# Altium PCB temperature.PcbDoc (part 2 of 3)
Units mil, origin at the board's own origin, x right, y up, seen from the top; angles counter-clockwise.
Board outline 6000 x 4000 mil, 2 copper layers (Top Layer, Bottom Layer); 10 components, 17 nets, 62 pads, 0 vias.
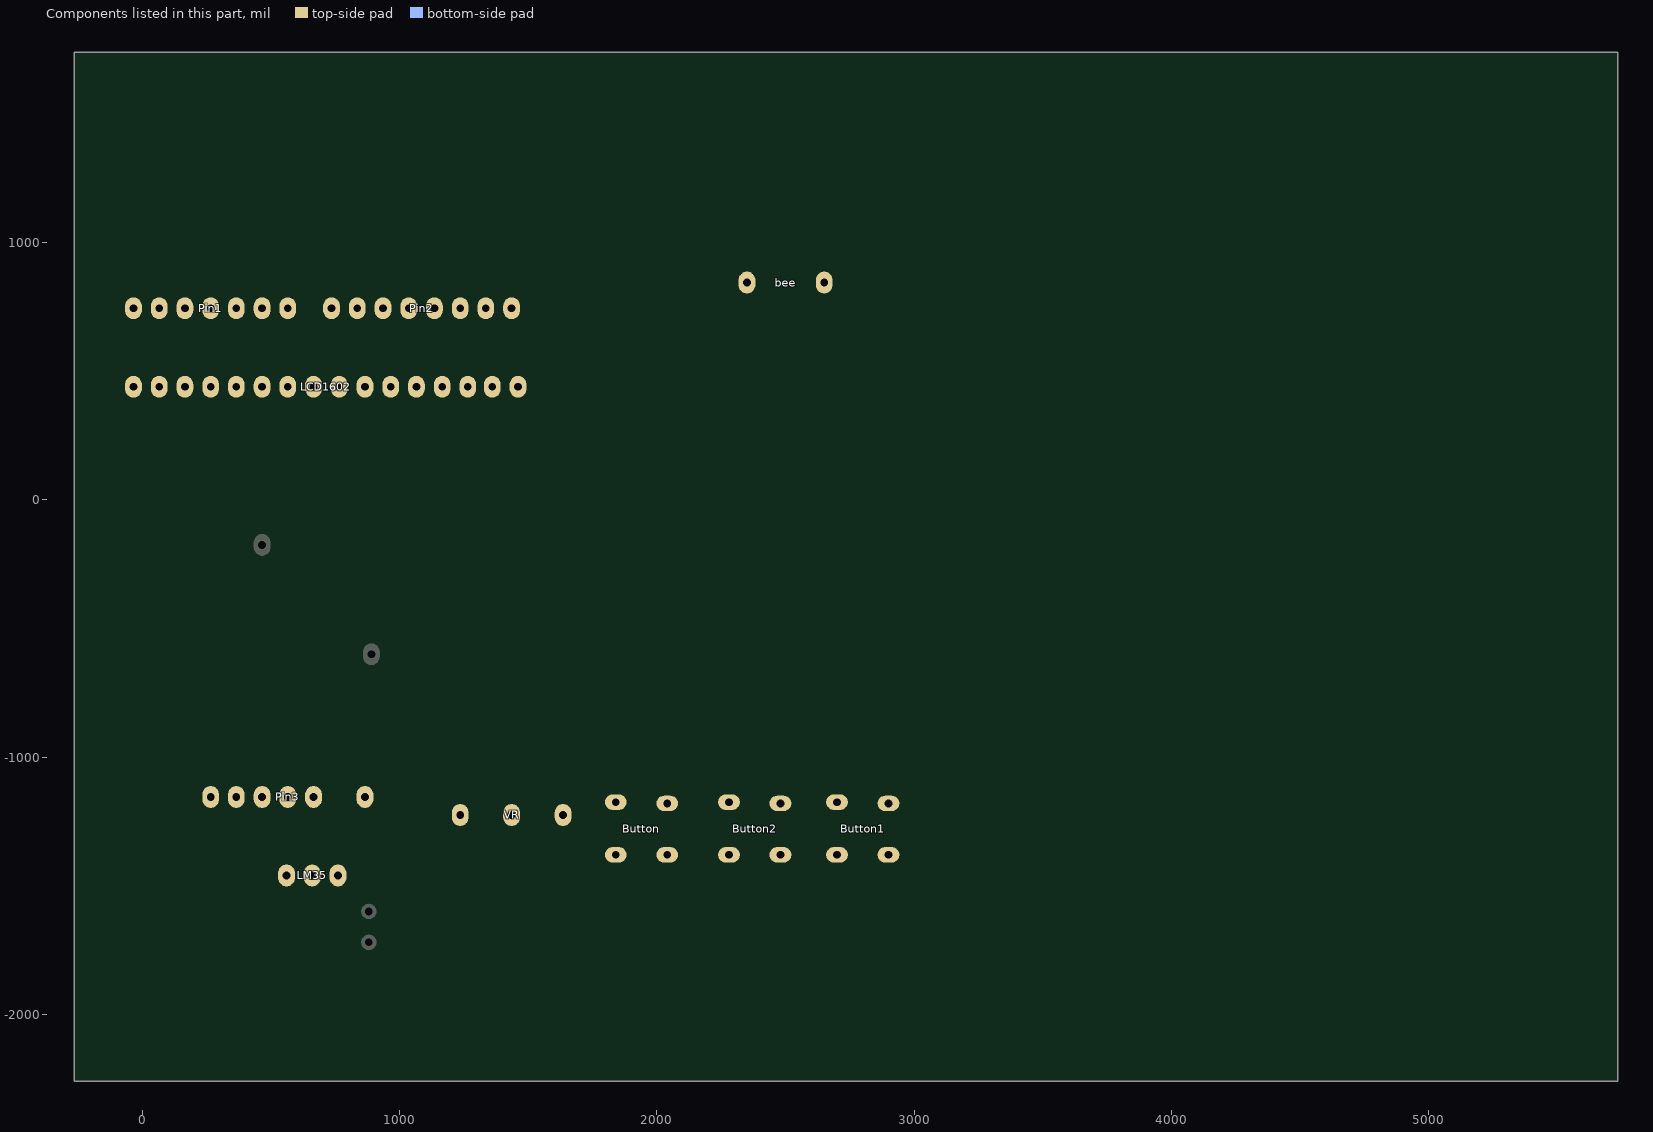
[diagram p2: the components of this part, seen from the top]

## Nets (pads, with @x,y where several pads share a name; then routed paths per layer and width w, separated by ;. In a path a pad name is that pad's centre, name@x,y a point inside that pad or via, vN(x,y) a via of type N, cw(c..) or ccw(c..) an arc to the next point about the centre after c; other vN are vias at no path point) (continued)
copper on no net: (continued)
  Bottom Layer w1: 2096,-334 2121,-334 ; 2097,-339 2128,-339 ; 2097,-338 2131,-338 ; 2097,-337 2121,-337 ; 2097,-336 2123,-336 ; 2097,-335 2122,-335 ; 2097,-333 2121,-333 ; 2097,-332 2119,-332 ; 2097,-331 2120,-331 ; 2097,-330 2118,-330 ; 2097,-329 2118,-329 ; 2097,-328 2117,-328 ; 2098,-342 2134,-342 ; 2098,-341 2133,-341 ; 2098,-340 2131,-340 ; 2098,-327 2116,-327 ; 2098,-326 2117,-326 ; 2098,-325 2115,-325 ; 2098,-324 2115,-324 ; 2099,-344 2139,-344 ; 2099,-343 2136,-343 ; 2099,-323 2116,-323 ; 2099,-322 2115,-322 ; 2100,-346 2160,-346 ; 2100,-345 2146,-345 ; 2100,-321 2116,-321 ; 2100,-320 2116,-320 ; 2100,-319 2116,-319 ; 2100,-318 2116,-318 ; 2101,-347 2168,-347 ; 2101,-317 2116,-317 ; 2101,-316 2116,-316 ; 2101,-315 2118,-315 ; 2102,-348 2178,-348 ; 2102,-314 2117,-314 ; 2102,-313 2118,-313 ; 2102,-312 2118,-312 ; 2103,-350 2195,-350 ; 2103,-349 2182,-349 ; 2104,-311 2119,-311 ; 2104,-310 2121,-310 ; 2105,-351 2195,-351 ; 2105,-309 2120,-309 ; 2105,-308 2122,-308 ; 2105,-307 2122,-307 ; 2105,-306 2122,-306 ; 2106,-305 2124,-305 ; 2106,-304 2124,-304 ; 2107,-352 2203,-352 ; 2107,-303 2123,-303 ; 2107,-302 2125,-302 ; 2107,-301 2124,-301 ; 2108,-300 2124,-300 ; 2108,-299 2126,-299 ; 2108,-298 2125,-298 ; 2109,-353 2211,-353 ; 2109,-297 2126,-297 ; 2109,-296 2125,-296 ; 2109,-295 2127,-295 ; 2109,-294 2126,-294 ; 2109,-220 2118,-220 ; 2109,-219 2119,-219 ; 2109,-218 2118,-218 ; 2109,-217 2119,-217 ; 2109,-216 2118,-216 ; 2109,-215 2119,-215 ; 2109,-214 2117,-214 ; 2109,-213 2117,-213 ; 2109,-212 2119,-212 ; 2109,-211 2119,-211 ; 2109,-210 2117,-210 ; 2109,-209 2119,-209 ; 2109,-208 2119,-208 ; 2109,-207 2119,-207 ; 2109,-206 2119,-206 ; 2109,-205 2120,-205 ; 2109,-204 2120,-204 ; 2109,-203 2119,-203 ; 2109,-202 2121,-202 ; 2109,-201 2120,-201 ; 2109,-200 2124,-200 ; 2109,-199 2123,-199 ; 2110,-293 2127,-293 ; 2110,-292 2127,-292 ; 2110,-291 2126,-291 ; 2110,-241 2123,-241 ; 2110,-240 2120,-240 ; 2110,-225 2119,-225 ; 2110,-224 2119,-224 ; 2110,-223 2119,-223 ; 2110,-222 2119,-222 ; 2110,-221 2119,-221 ; 2110,-198 2122,-198 ; 2110,-197 2124,-197 ; 2111,-290 2126,-290 ; 2111,-289 2126,-289 ; 2111,-288 2128,-288 ; 2111,-243 2122,-243 ; 2111,-242 2120,-242 ; 2111,-239 2121,-239 ; 2111,-238 2121,-238 ; 2111,-237 2119,-237 ; 2111,-236 2121,-236 ; 2111,-235 2122,-235 ; 2111,-234 2122,-234 ; 2111,-233 2120,-233 ; 2111,-232 2120,-232 ; 2111,-231 2121,-231 ; 2111,-230 2118,-230 ; 2111,-229 2119,-229 ; 2111,-228 2120,-228 ; 2111,-227 2120,-227 ; 2111,-226 2118,-226 ; 2111,-196 2122,-196 ; 2111,-195 2122,-195 ; 2112,-287 2127,-287 ; 2112,-286 2127,-286 ; 2112,-285 2126,-285 ; 2112,-284 2128,-284 ; 2112,-283 2127,-283 ; 2112,-282 2127,-282 ; 2112,-281 2127,-281 ; 2112,-275 2128,-275 ; 2112,-245 2123,-245 ; 2112,-244 2121,-244 ; 2112,-194 2124,-194 ; 2113,-354 2212,-354 ; 2113,-280 2127,-280 ; 2113,-279 2128,-279 ; 2113,-278 2127,-278 ; 2113,-277 2127,-277 ; 2113,-276 2127,-276 ; 2113,-274 2128,-274 ; 2113,-273 2127,-273 ; 2113,-272 2127,-272 ; 2113,-271 2127,-271 ; 2113,-270 2127,-270 ; 2113,-257 2125,-257 ; 2113,-256 2125,-256 ; 2113,-255 2125,-255 ; 2113,-254 2125,-254 ; 2113,-253 2124,-253 ; 2113,-252 2124,-252 ; 2113,-251 2125,-251 ; 2113,-250 2122,-250 ; 2113,-249 2124,-249 ; 2113,-248 2122,-248 ; 2113,-247 2121,-247 ; 2113,-246 2123,-246 ; 2113,-193 2126,-193 ; 2114,-269 2128,-269 ; 2114,-268 2127,-268 ; 2114,-267 2127,-267 ; 2114,-266 2127,-266 ; 2114,-265 2126,-265 ; 2114,-264 2126,-264 ; 2114,-263 2127,-263 ; 2114,-262 2126,-262 ; 2114,-261 2125,-261 ; 2114,-260 2124,-260 ; 2114,-259 2125,-259 ; 2114,-258 2124,-258 ; 2114,-192 2130,-192 ; 2114,-191 2129,-191 ; 2115,-355 2216,-355 ; 2115,-190 2130,-190 ; 2116,-189 2131,-189 ; 2117,-188 2135,-188 ; 2118,-356 2218,-356 ; 2118,-314 2119,-314 ; 2118,-214 2119,-214 ; 2118,-213 2119,-213 ; 2118,-210 2119,-210 ; 2118,-187 2137,-187 ; 2119,-312 2120,-312 ; 2119,-230 2121,-230 ; 2119,-226 2120,-226 ; 2119,-186 2137,-186 ; 2120,-332 2121,-332 ; 2120,-203 2121,-203 ; 2120,-185 2148,-185 ; 2121,-309 2122,-309 ; 2121,-242 2122,-242 ; 2121,-240 2122,-240 ; 2121,-237 2122,-237 ; 2121,-232 2122,-232 ; 2122,-337 2128,-337 ; 2122,-333 2123,-333 ; 2122,-247 2123,-247 ; 2122,-184 2190,-184 ; 2123,-250 2125,-250 ; 2123,-248 2125,-248 ; 2123,-236 2124,-236 ; 2123,-198 2125,-198 ; 2123,-196 2125,-196 ; 2123,-195 2124,-195 ; 2123,-183 2192,-183 ; 2124,-357 2224,-357 ; 2124,-336 2128,-336 ; 2125,-335 2126,-335 ; 2125,-301 2126,-301 ; 2125,-300 2126,-300 ; 2125,-260 2126,-260 ; 2125,-258 2126,-258 ; 2125,-199 2126,-199 ; 2125,-194 2126,-194 ; 2126,-358 2230,-358 ; 2126,-197 2127,-197 ; 2126,-195 2127,-195 ; 2126,-182 2192,-182 ; 2127,-291 2128,-291 ; 2127,-290 2128,-290 ; 2127,-289 2128,-289 ; 2127,-193 2128,-193 ; 2128,-181 2191,-181 ; 2129,-289 2130,-289 ; 2130,-359 2237,-359 ; 2130,-191 2131,-191 ; 2131,-339 2132,-339 ; 2132,-340 2136,-340 ; 2132,-191 2133,-191 ; 2132,-190 2133,-190 ; 2132,-189 2133,-189 ; 2132,-180 2194,-180 ; 2134,-360 2241,-360 ; 2134,-341 2137,-341 ; 2134,-189 2135,-189 ; 2138,-361 2249,-361 ; 2138,-179 2157,-179 ; 2139,-343 2141,-343 ; 2139,-186 2140,-186 ; 2141,-362 2250,-362 ; 2141,-344 2142,-344 ; 2144,-343 2145,-343 ; 2146,-363 2250,-363 ; 2147,-344 2148,-344 ; 2148,-188 2149,-188 ; 2148,-186 2149,-186 ; 2149,-364 2258,-364 ; 2149,-345 2151,-345 ; 2149,-343 2150,-343 ; 2151,-185 2154,-185 ; 2152,-345 2153,-345 ; 2152,-344 2153,-344 ; 2153,-365 2260,-365 ; 2153,-186 2180,-186 ; 2155,-185 2188,-185 ; 2156,-345 2158,-345 ; 2156,-187 2176,-187 ; 2157,-366 2266,-366 ; 2158,-188 2159,-188 ; 2160,-367 2264,-367 ; 2160,-345 2162,-345 ; 2160,-188 2163,-188 ; 2161,-189 2164,-189 ; 2163,-368 2274,-368 ; 2163,-346 2174,-346 ; 2163,-345 2164,-345 ; 2163,-190 2164,-190 ; 2164,-188 2177,-188 ; 2164,-179 2196,-179 ; 2165,-190 2174,-190 ; 2166,-369 2274,-369 ; 2166,-189 2177,-189 ; 2169,-347 2171,-347 ; 2170,-370 2279,-370 ; 2172,-347 2176,-347 ; 2173,-371 2283,-371 ; 2173,-178 2196,-178 ; 2177,-372 2294,-372 ; 2177,-187 2178,-187 ; 2177,-177 2193,-177 ; 2178,-188 2179,-188 ; 2179,-348 2182,-348 ; 2179,-187 2181,-187 ; 2179,-176 2197,-176 ; 2181,-373 2293,-373 ; 2182,-187 2183,-187 ; 2182,-175 2192,-175 ; 2183,-348 2185,-348 ; 2184,-186 2185,-186 ; 2184,-174 2199,-174 ; 2185,-374 2299,-374 ; 2185,-173 2199,-173 ; 2186,-172 2198,-172 ; 2187,-171 2195,-171 ; 2188,-375 2302,-375 ; 2188,-170 2199,-170 ; 2189,-169 2200,-169 ; 2190,-168 2199,-168 ; 2190,-167 2202,-167 ; 2191,-166 2203,-166 ; 2191,-165 2202,-165 ; 2192,-376 2313,-376 ; 2192,-181 2195,-181 ; 2192,-164 2204,-164 ; 2192,-163 2203,-163 ; 2193,-175 2199,-175 ; 2193,-162 2205,-162 ; 2193,-161 2204,-161 ; 2194,-177 2197,-177 ; 2194,-160 2204,-160 ; 2195,-377 2308,-377 ; 2195,-159 2205,-159 ; 2195,-158 2206,-158 ; 2196,-350 2198,-350 ; 2196,-171 2200,-171 ; 2196,-157 2206,-157 ; 2197,-351 2203,-351 ; 2197,-156 2205,-156 ; 2197,-155 2206,-155 ; 2197,-154 2206,-154 ; 2198,-153 2207,-153 ; 2199,-152 2206,-152 ; 2199,-151 2207,-151 ; 2199,-124 2274,-124 ; 2199,-123 2274,-123 ; 2199,-122 2274,-122 ; 2199,-121 2274,-121 ; 2199,-120 2274,-120 ; 2199,-119 2274,-119 ; 2199,-118 2274,-118 ; 2199,-117 2274,-117 ; 2199,-116 2274,-116 ; 2199,-115 2256,-115 ; 2199,-114 2256,-114 ; 2199,-113 2256,-113 ; 2199,-112 2256,-112 ; 2199,-111 2256,-111 ; 2199,-110 2256,-110 ; 2199,-109 2255,-109 ; 2199,-108 2253,-108 ; 2199,-107 2253,-107 ; 2199,-106 2253,-106 ; 2199,-105 2253,-105 ; 2199,-104 2253,-104 ; 2199,-103 2252,-103 ; 2199,-102 2252,-102 ; 2200,-378 2395,-378 ; 2200,-172 2201,-172 ; 2200,-168 2202,-168 ; 2200,-150 2207,-150 ; 2200,-149 2208,-149 ; 2200,-131 2234,-131 ; 2200,-130 2276,-130 ; 2200,-129 2275,-129 ; 2200,-128 2275,-128 ; 2200,-127 2275,-127 ; 2200,-126 2275,-126 ; 2200,-125 2274,-125 ; 2200,-101 2252,-101 ; 2200,-100 2252,-100 ; 2200,-99 2252,-99 ; 2200,-98 2252,-98 ; 2200,-97 2252,-97 ; 2200,-96 2252,-96 ; 2200,-95 2252,-95 ; 2200,-94 2252,-94 ; 2200,-93 2253,-93 ; 2201,-169 2202,-169 ; 2201,-148 2209,-148 ; 2201,-132 2228,-132 ; 2201,-92 2275,-92 ; 2202,-147 2209,-147 ; 2202,-146 2210,-146 ; 2202,-134 2223,-134 ; 2202,-133 2224,-133 ; 2202,-91 2253,-91 ; 2202,-90 2275,-90 ; 2202,-89 2275,-89 ; 2202,-88 2275,-88 ; 2203,-165 2204,-165 ; 2203,-145 2210,-145 ; 2203,-135 2221,-135 ; 2203,-87 2251,-87 ; 2203,-86 2251,-86 ; 2204,-379 2394,-379 ; 2204,-352 2205,-352 ; 2204,-144 2211,-144 ; 2204,-143 2212,-143 ; 2204,-137 2219,-137 ; 2204,-136 2220,-136 ; 2204,-85 2251,-85 ; 2204,-84 2251,-84 ; 2204,-83 2251,-83 ; 2205,-138 2217,-138 ; 2205,-82 2251,-82 ; 2205,-81 2251,-81 ; 2205,-80 2251,-80 ; 2206,-352 2208,-352 ; 2206,-142 2212,-142 ; 2206,-141 2213,-141 ; 2206,-140 2214,-140 ; 2206,-139 2216,-139 ; 2206,-79 2251,-79 ; 2207,-152 2208,-152 ; 2207,-78 2251,-78 ; 2207,-77 2251,-77 ; 2208,-380 2393,-380 ; 2208,-150 2209,-150 ; 2208,-76 2251,-76 ; 2209,-352 2210,-352 ; 2209,-75 2251,-75 ; 2209,-74 2251,-74 ; 2210,-73 2251,-73 ; 2210,-72 2251,-72 ; 2211,-71 2251,-71 ; 2212,-381 2393,-381 ; 2212,-353 2213,-353 ; 2212,-70 2251,-70 ; 2212,-69 2277,-69 ; 2213,-68 2278,-68 ; 2213,-67 2278,-67 ; 2214,-66 2278,-66 ; 2215,-382 2392,-382 ; 2215,-65 2279,-65 ; 2215,-64 2279,-64 ; 2216,-63 2279,-63 ; 2217,-355 2218,-355 ; 2217,-62 2279,-62 ; 2217,-61 2279,-61 ; 2218,-60 2280,-60 ; 2218,-59 2280,-59 ; 2219,-356 2224,-356 ; 2219,-58 2280,-58 ; 2220,-383 2392,-383 ; 2220,-57 2280,-57 ; 2220,-56 2280,-56 ; 2221,-55 2281,-55 ; 2221,-54 2281,-54 ; 2222,-53 2281,-53 ; 2223,-384 2390,-384 ; 2223,-52 2282,-52 ; 2223,-51 2282,-51 ; 2224,-50 2282,-50 ; 2224,-49 2282,-49 ; 2225,-357 2228,-357 ; 2225,-356 2226,-356 ; 2225,-48 2283,-48 ; 2225,-47 2283,-47 ; 2225,-46 2283,-46 ; 2226,-45 2284,-45 ; 2227,-385 2388,-385 ; 2227,-44 2284,-44 ; 2227,-43 2284,-43 ; 2228,-42 2285,-42 ; 2228,-41 2285,-41 ; 2229,-357 2230,-357 ; 2229,-40 2285,-40 ; 2229,-39 2285,-39 ; 2230,-38 2286,-38 ; 2230,-37 2286,-37 ; 2231,-386 2382,-386 ; 2231,-36 2287,-36 ; 2232,-358 2233,-358 ; 2232,-35 2287,-35 ; 2232,-34 2287,-34 ; 2232,-33 2288,-33 ; 2233,-32 2289,-32 ; 2233,-31 2289,-31 ; 2234,-358 2235,-358 ; 2234,-30 2289,-30 ; 2234,-29 2290,-29 ; 2235,-357 2236,-357 ; 2235,-131 2276,-131 ; 2235,-28 2290,-28 ; 2235,-27 2290,-27 ; 2235,-26 2291,-26 ; 2236,-387 2377,-387 ; 2236,-358 2238,-358 ; 2236,-25 2291,-25 ; 2236,-24 2292,-24 ; 2237,-23 2292,-23 ; 2237,-22 2292,-22 ; 2238,-359 2240,-359 ; 2238,-21 2293,-21 ; 2238,-20 2293,-20 ; 2239,-358 2240,-358 ; 2239,-19 2294,-19 ; 2239,-18 2294,-18 ; 2240,-132 2271,-132 ; 2240,-17 2294,-17 ; 2240,-16 2295,-16 ; 2240,-15 2295,-15 ; 2241,-388 2376,-388 ; 2241,-359 2242,-359 ; 2241,-14 2296,-14 ; 2241,-13 2296,-13 ; 2242,-12 2297,-12 ; 2242,-11 2297,-11 ; 2242,-10 2297,-10 ; 2242,-9 2298,-9 ; 2243,-389 2375,-389 ; 2243,-133 2272,-133 ; 2243,-8 2298,-8 ; 2243,-7 2299,-7 ; 2244,-359 2245,-359 ; 2244,-6 2299,-6 ; 2244,-5 2300,-5 ; 2244,-4 2300,-4 ; 2245,-3 2301,-3 ; 2245,-2 2301,-2 ; 2245,-1 2302,-1 ; 2246,-135 2274,-135 ; 2246,-134 2272,-134 ; 2246,0 2302,0 ; 2246,1 2302,1 ; 2247,-390 2374,-390 ; 2247,-136 2274,-136 ; 2247,2 2303,2 ; 2247,3 2304,3 ; 2247,4 2304,4 ; 2248,5 2305,5 ; 2248,6 2305,6 ; 2248,7 2306,7 ; 2249,-137 2276,-137 ; 2249,8 2306,8 ; 2249,9 2306,9 ; 2249,10 2307,10 ; 2250,-361 2251,-361 ; 2250,11 2307,11 ; 2250,12 2308,12 ; 2250,13 2308,13 ; 2251,-391 2374,-391 ; 2251,-363 2254,-363 ; 2251,-139 2277,-139 ; 2251,-138 2277,-138 ; 2251,14 2309,14 ; 2251,15 2310,15 ; 2251,16 2310,16 ; 2251,17 2310,17 ; 2252,-361 2253,-361 ; 2252,-87 2275,-87 ; 2252,-86 2275,-86 ; 2252,-85 2276,-85 ; 2252,-84 2276,-84 ; 2252,-83 2276,-83 ; 2252,-82 2276,-82 ; 2252,-81 2276,-81 ; 2252,-80 2276,-80 ; 2252,-79 2276,-79 ; 2252,-78 2277,-78 ; 2252,-77 2277,-77 ; 2252,-76 2277,-76 ; 2252,-75 2277,-75 ; 2252,-74 2277,-74 ; 2252,-73 2277,-73 ; 2252,-72 2277,-72 ; 2252,-71 2277,-71 ; 2252,-70 2277,-70 ; 2252,18 2311,18 ; 2252,19 2312,19 ; 2253,-392 2372,-392 ; 2253,-140 2279,-140 ; 2253,20 2312,20 ; 2253,21 2313,21 ; 2253,22 2314,22 ; 2254,-141 2280,-141 ; 2254,-96 2275,-96 ; 2254,-95 2275,-95 ; 2254,-94 2275,-94 ; 2254,-93 2275,-93 ; 2254,-91 2275,-91 ; 2254,23 2314,23 ; 2254,24 2314,24 ; 2254,25 2315,25 ; 2255,-363 2256,-363 ; 2255,-142 2281,-142 ; 2255,-102 2274,-102 ; 2255,-101 2274,-101 ; 2255,-100 2274,-100 ; 2255,-99 2274,-99 ; 2255,-98 2274,-98 ; 2255,-97 2274,-97 ; 2255,26 2316,26 ; 2255,27 2316,27 ; 2255,28 2317,28 ; 2256,-393 2372,-393 ; 2256,-143 2282,-143 ; 2256,-109 2274,-109 ; 2256,-108 2274,-108 ; 2256,-107 2274,-107 ; 2256,-106 2274,-106 ; 2256,-105 2274,-105 ; 2256,-104 2274,-104 ; 2256,-103 2274,-103 ; 2256,29 2317,29 ; 2256,30 2318,30 ; 2256,31 2318,31 ; 2256,32 2319,32 ; 2257,-363 2258,-363 ; 2257,-145 2284,-145 ; 2257,-144 2282,-144 ; 2257,-115 2274,-115 ; 2257,-114 2274,-114 ; 2257,-113 2274,-113 ; 2257,-112 2274,-112 ; 2257,-111 2274,-111 ; 2257,-110 2274,-110 ; 2257,33 2319,33 ; 2257,34 2320,34 ; 2257,35 2320,35 ; 2257,36 2320,36 ; 2258,-146 2285,-146 ; 2258,37 2321,37 ; 2258,38 2322,38 ; 2258,39 2322,39 ; 2258,40 2323,40 ; 2259,-394 2370,-394 ; 2259,-364 2260,-364 ; 2259,41 2323,41 ; 2259,42 2324,42 ; 2259,43 2325,43 ; 2259,44 2325,44 ; 2260,-148 2288,-148 ; 2260,-147 2287,-147 ; 2260,45 2326,45 ; 2260,46 2326,46 ; 2260,47 2327,47 ; 2260,48 2327,48 ; 2261,-365 2262,-365 ; 2261,-149 2289,-149 ; 2261,49 2328,49 ; 2261,50 2328,50 ; 2261,51 2329,51 ; 2261,52 2330,52 ; 2262,-395 2369,-395 ; 2262,-150 2290,-150 ; 2262,53 2330,53 ; 2262,54 2331,54 ; 2263,55 2331,55 ; 2263,56 2332,56 ; 2264,-396 2369,-396 ; 2264,-152 2292,-152 ; 2264,-151 2291,-151 ; 2264,57 2332,57 ; 2264,58 2332,58 ; 2264,59 2332,59 ; 2265,-367 2270,-367 ; 2265,-153 2293,-153 ; 2265,60 2332,60 ; 2266,-397 2367,-397 ; 2266,-365 2267,-365 ; 2266,-154 2294,-154 ; 2266,61 2333,61 ; 2266,62 2333,62 ; 2267,-366 2268,-366 ; 2267,-155 2295,-155 ; 2267,63 2333,63 ; 2267,64 2333,64 ; 2268,-398 2366,-398 ; 2268,-157 2298,-157 ; 2268,-156 2297,-156 ; 2268,65 2333,65 ; 2269,-160 2301,-160 ; 2269,66 2333,66 ; 2269,67 2333,67 ; 2269,68 2333,68 ; 2270,-159 2300,-159 ; 2270,-158 2298,-158 ; 2270,69 2333,69 ; 2270,70 2333,70 ; 2271,-399 2365,-399 ; 2271,-162 2303,-162 ; 2271,-161 2302,-161 ; 2271,71 2334,71 ; 2272,-163 2305,-163 ; 2272,72 2334,72 ; 2272,73 2334,73 ; 2272,74 2334,74 ; 2273,-400 2364,-400 ; 2273,-132 2276,-132 ; 2273,75 2334,75 ; 2274,-165 2306,-165 ; 2274,-164 2305,-164 ; 2274,76 2334,76 ; 2274,77 2335,77 ; 2275,-369 2282,-369 ; 2275,-368 2276,-368 ; 2275,-167 2309,-167 ; 2275,-166 2308,-166 ; 2275,78 2335,78 ; 2276,-401 2363,-401 ; 2276,-169 2312,-169 ; 2276,-168 2310,-168 ; 2276,79 2335,79 ; 2276,80 2335,80 ; 2277,-170 2313,-170 ; 2277,81 2335,81 ; 2278,-171 2314,-171 ; 2278,82 2336,82 ; 2279,-402 2362,-402 ; 2279,-173 2317,-173 ; 2279,-172 2315,-172 ; 2279,83 2336,83 ; 2279,84 2336,84 ; 2280,85 2336,85 ; 2281,-370 2286,-370 ; 2281,-175 2320,-175 ; 2281,-174 2319,-174 ; 2281,86 2336,86 ; 2282,-403 2361,-403 ; 2282,-177 2322,-177 ; 2282,-176 2321,-176 ; 2282,87 2337,87 ; 2282,88 2337,88 ; 2283,-179 2325,-179 ; 2283,-178 2323,-178 ; 2284,-404 2359,-404 ; 2284,-371 2290,-371 ; 2284,-180 2325,-180 ; 2284,89 2337,89 ; 2284,90 2337,90 ; 2285,-181 2327,-181 ; 2285,91 2338,91 ; 2286,-405 2358,-405 ; 2286,-183 2329,-183 ; 2286,-182 2328,-182 ; 2286,92 2338,92 ; 2287,-185 2332,-185 ; 2287,-184 2331,-184 ; 2287,93 2338,93 ; 2288,-186 2334,-186 ; 2288,94 2338,94 ; 2288,95 2339,95 ; 2289,-406 2357,-406 ; 2289,-187 2335,-187 ; 2289,96 2339,96 ; 2290,-189 2338,-189 ; 2290,-188 2336,-188 ; 2290,97 2339,97 ; 2291,-407 2355,-407 ; 2291,-191 2339,-191 ; 2291,-190 2338,-190 ; 2291,98 2340,98 ; 2292,-193 2342,-193 ; 2292,-192 2341,-192 ; 2292,99 2340,99 ; 2293,-194 2343,-194 ; 2293,100 2340,100 ; 2294,-408 2353,-408 ; 2294,-373 2295,-373 ; 2294,-196 2346,-196 ; 2294,-195 2344,-195 ; 2294,101 2341,101 ; 2295,-372 2297,-372 ; 2295,102 2341,102 ; 2295,103 2342,103 ; 2296,-373 2298,-373 ; 2296,-198 2348,-198 ; 2296,-197 2347,-197 ; 2296,104 2342,104 ; 2297,-409 2351,-409 ; 2297,-201 2352,-201 ; 2297,-200 2351,-200 ; 2297,-199 2349,-199 ; 2297,105 2343,105 ; 2298,-202 2354,-202 ; 2298,106 2343,106 ; 2299,-373 2300,-373 ; 2299,-203 2355,-203 ; 2299,107 2343,107 ; 2299,108 2344,108 ; 2300,-410 2347,-410 ; 2300,-374 2303,-374 ; 2300,-205 2358,-205 ; 2300,-204 2356,-204 ; 2300,109 2344,109 ; 2301,-207 2360,-207 ; 2301,-206 2359,-206 ; 2301,110 2345,110 ; 2302,-208 2361,-208 ; 2302,111 2346,111 ; 2302,112 2346,112 ; 2303,-411 2345,-411 ; 2303,-211 2365,-211 ; 2303,-210 2364,-210 ; 2303,-209 2363,-209 ; 2303,113 2346,113 ; 2304,114 2347,114 ; 2305,-214 2369,-214 ; 2305,-213 2368,-213 ; 2305,-212 2367,-212 ; 2305,115 2348,115 ; 2306,-412 2342,-412 ; 2306,-215 2370,-215 ; 2306,116 2348,116 ; 2307,-217 2372,-217 ; 2307,-216 2371,-216 ; 2307,117 2349,117 ; 2308,-219 2374,-219 ; 2308,-218 2373,-218 ; 2308,118 2349,118 ; 2308,119 2350,119 ; 2309,-377 2395,-377 ; 2309,-220 2375,-220 ; 2309,120 2350,120 ; 2310,-222 2377,-222 ; 2310,-221 2376,-221 ; 2310,121 2351,121 ; 2310,122 2351,122 ; 2311,-413 2338,-413 ; 2311,-224 2379,-224 ; 2311,-223 2378,-223 ; 2311,123 2352,123 ; 2312,-225 2379,-225 ; 2312,124 2353,124 ; 2313,-375 2400,-375 ; 2313,-227 2381,-227 ; 2313,-226 2380,-226 ; 2313,125 2353,125 ; 2314,-376 2397,-376 ; 2314,-228 2382,-228 ; 2314,126 2354,126 ; 2315,-232 2384,-232 ; 2315,-230 2383,-230 ; 2315,-229 2382,-229 ; 2315,127 2355,127 ; 2315,128 2355,128 ; 2316,-233 2384,-233 ; 2316,-231 2383,-231 ; 2316,129 2356,129 ; 2317,-374 2402,-374 ; 2317,-235 2386,-235 ; 2317,-234 2384,-234 ; 2317,130 2356,130 ; 2318,-414 2335,-414 ; 2318,-236 2386,-236 ; 2318,131 2357,131 ; 2318,132 2357,132 ; 2319,-237 2386,-237 ; 2320,-239 2387,-239 ; 2320,-238 2386,-238 ; 2320,133 2358,133 ; 2320,134 2359,134 ; 2321,-241 2387,-241 ; 2321,-240 2387,-240 ; 2321,135 2359,135 ; 2322,-373 2323,-373 ; 2322,-242 2387,-242 ; 2322,136 2360,136 ; 2322,137 2360,137 ; 2323,-244 2387,-244 ; 2323,-243 2387,-243 ; 2323,138 2361,138 ; 2324,-373 2418,-373 ; 2324,-372 2325,-372 ; 2324,-245 2387,-245 ; 2324,139 2362,139 ; 2325,-371 2326,-371 ; 2325,-247 2387,-247 ; 2325,-246 2387,-246 ; 2325,140 2362,140 ; 2325,141 2363,141 ; 2326,-372 2425,-372 ; 2326,-248 2387,-248 ; 2326,142 2363,142 ; 2327,-370 2441,-370 ; 2327,-250 2387,-250 ; 2327,-249 2387,-249 ; 2327,143 2364,143 ; 2328,-371 2431,-371 ; 2328,-253 2387,-253 ; 2328,-252 2387,-252 ; 2328,-251 2387,-251 ; 2328,144 2364,144 ; 2328,145 2365,145 ; 2329,-369 2330,-369 ; 2329,-254 2387,-254 ; 2329,146 2365,146 ; 2330,-255 2387,-255 ; 2330,147 2366,147 ; 2331,-369 2651,-369 ; 2331,-368 2332,-368 ; 2331,-256 2386,-256 ; 2331,148 2367,148 ; 2331,149 2367,149 ; 2332,-367 2333,-367 ; 2332,-258 2385,-258 ; 2332,-257 2386,-257 ; 2333,-368 2648,-368 ; 2333,-260 2384,-260 ; 2333,-259 2384,-259 ; 2333,150 2368,150 ; 2333,151 2369,151 ; 2334,-367 2644,-367 ; 2334,-261 2383,-261 ; 2334,152 2369,152 ; 2335,-366 2646,-366 ; 2335,-365 2642,-365 ; 2335,-263 2381,-263 ; 2335,-262 2382,-262 ; 2335,153 2370,153 ; 2336,-364 2644,-364 ; 2336,-265 2379,-265 ; 2336,-264 2380,-264 ; 2336,154 2370,154 ; 2336,155 2371,155 ; 2337,-266 2377,-266 ; 2337,156 2372,156 ; 2338,-363 2644,-363 ; 2338,-361 2339,-361 ; 2338,-268 2373,-268 ; 2338,-267 2375,-267 ; 2338,157 2372,157 ; 2338,158 2373,158 ; 2339,-270 2369,-270 ; 2339,-269 2371,-269 ; 2339,159 2373,159 ; 2339,160 2374,160 ; 2340,-362 2641,-362 ; 2340,-361 2642,-361 ; 2340,-360 2641,-360 ; 2340,-359 2342,-359 ; 2340,-271 2366,-271 ; 2340,161 2375,161 ; 2341,-273 2342,-273 ; 2341,162 2375,162 ; 2342,-272 2363,-272 ; 2342,163 2376,163 ; 2343,-359 2636,-359 ; 2343,-358 2638,-358 ; 2343,-357 2639,-357 ; 2343,-356 2638,-356 ; 2343,-275 2353,-275 ; 2343,-274 2353,-274 ; 2343,-273 2360,-273 ; 2343,164 2377,164 ; 2343,165 2378,165 ; 2344,-355 2637,-355 ; 2344,-276 2353,-276 ; 2344,166 2378,166 ; 2344,167 2379,167 ; 2345,-354 2637,-354 ; 2345,-353 2346,-353 ; 2345,-352 2636,-352 ; 2345,-277 2354,-277 ; 2345,168 2379,168 ; 2345,169 2379,169 ; 2346,-351 2631,-351 ; 2346,-280 2356,-280 ; 2346,-279 2355,-279 ; 2346,-278 2354,-278 ; 2346,170 2379,170 ; 2346,171 2379,171 ; 2346,172 2379,172 ; 2347,-353 2636,-353 ; 2347,-281 2356,-281 ; 2347,173 2379,173 ; 2347,335 2376,335 ; 2347,336 2376,336 ; 2347,337 2377,337 ; 2347,338 2378,338 ; 2347,344 2379,344 ; 2347,345 2380,345 ; 2347,346 2380,346 ; 2347,347 2381,347 ; 2347,348 2383,348 ; 2347,349 2384,349 ; 2347,350 2385,350 ; 2347,351 2387,351 ; 2347,352 2388,352 ; 2347,353 2390,353 ; 2347,354 2391,354 ; 2347,355 2392,355 ; 2347,356 2502,356 ; 2347,357 2504,357 ; 2347,358 2506,358 ; 2347,359 2508,359 ; 2347,360 2512,360 ; 2347,361 2620,361 ; 2347,362 2620,362 ; 2347,363 2619,363 ; 2347,364 2619,364 ; 2348,-350 2634,-350 ; 2348,-349 2633,-349 ; 2348,-283 2357,-283 ; 2348,-282 2357,-282 ; 2348,174 2379,174 ; 2348,175 2379,175 ; 2348,323 2370,323 ; 2348,324 2370,324 ; 2348,325 2371,325 ; 2348,326 2371,326 ; 2348,327 2372,327 ; 2348,328 2372,328 ; 2348,329 2372,329 ; 2348,330 2373,330 ; 2348,331 2373,331 ; 2348,332 2374,332 ; 2348,333 2374,333 ; 2348,334 2375,334 ; 2348,339 2378,339 ; 2348,340 2378,340 ; 2348,341 2379,341 ; 2348,342 2378,342 ; 2348,343 2379,343 ; 2348,365 2619,365 ; 2348,366 2619,366 ; 2348,367 2619,367 ; 2348,368 2619,368 ; 2348,369 2618,369 ; 2348,370 2618,370 ; 2348,371 2618,371 ; 2348,372 2618,372 ; 2348,373 2618,373 ; 2348,374 2618,374 ; 2348,375 2618,375 ; 2349,-348 2631,-348 ; 2349,-347 2630,-347 ; 2349,-346 2632,-346 ; 2349,-285 2359,-285 ; 2349,-284 2358,-284 ; 2349,176 2379,176 ; 2349,177 2379,177 ; 2349,178 2379,178 ; 2349,310 2369,310 ; 2349,311 2369,311 ; 2349,312 2369,312 ; 2349,313 2369,313 ; 2349,314 2369,314 ; 2349,315 2369,315 ; 2349,316 2369,316 ; 2349,317 2369,317 ; 2349,318 2369,318 ; 2349,319 2370,319 ; 2349,320 2370,320 ; 2349,321 2370,321 ; 2349,322 2370,322 ; 2349,376 2617,376 ; 2349,377 2617,377 ; 2349,378 2617,378 ; 2349,379 2617,379 ; 2349,380 2617,380 ; 2349,381 2616,381 ; 2349,382 2616,382 ; 2349,383 2616,383 ; 2350,-286 2359,-286 ; 2350,179 2379,179 ; 2350,294 2369,294 ; 2350,295 2369,295 ; 2350,296 2369,296 ; 2350,297 2369,297 ; 2350,298 2369,298 ; 2350,299 2369,299 ; 2350,300 2369,300 ; 2350,301 2369,301 ; 2350,302 2369,302 ; 2350,303 2369,303 ; 2350,304 2369,304 ; 2350,305 2369,305 ; 2350,306 2369,306 ; 2350,307 2369,307 ; 2350,308 2369,308 ; 2350,309 2369,309 ; 2350,384 2616,384 ; 2350,385 2616,385 ; 2350,386 2615,386 ; 2350,387 2615,387 ; 2350,388 2615,388 ; 2351,-345 2630,-345 ; 2351,-344 2630,-344 ; 2351,-343 2630,-343 ; 2351,-287 2360,-287 ; 2351,180 2379,180 ; 2351,181 2379,181 ; 2351,182 2379,182 ; 2351,273 2374,273 ; 2351,274 2374,274 ; 2351,275 2374,275 ; 2351,276 2373,276 ; 2351,277 2373,277 ; 2351,278 2373,278 ; 2351,279 2372,279 ; 2351,280 2372,280 ; 2351,281 2372,281 ; 2351,282 2371,282 ; 2351,283 2371,283 ; 2351,284 2371,284 ; 2351,285 2371,285 ; 2351,286 2370,286 ; 2351,287 2370,287 ; 2351,288 2370,288 ; 2351,289 2369,289 ; 2351,290 2369,290 ; 2351,291 2369,291 ; 2351,292 2369,292 ; 2351,293 2369,293 ; 2351,389 2614,389 ; 2351,390 2614,390 ; 2351,391 2614,391 ; 2351,392 2613,392 ; 2351,393 2613,393 ; 2351,394 2613,394 ; 2351,395 2612,395 ; 2352,-342 2628,-342 ; 2352,-341 2629,-341 ; 2352,-339 2628,-339 ; 2352,-288 2361,-288 ; 2352,183 2379,183 ; 2352,184 2379,184 ; 2352,259 2381,259 ; 2352,260 2380,260 ; 2352,261 2379,261 ; 2352,262 2379,262 ; 2352,263 2378,263 ; 2352,264 2378,264 ; 2352,265 2377,265 ; 2352,266 2377,266 ; 2352,267 2376,267 ; 2352,268 2376,268 ; 2352,269 2375,269 ; 2352,270 2375,270 ; 2352,271 2375,271 ; 2352,272 2374,272 ; 2352,396 2612,396 ; 2352,397 2612,397 ; 2352,398 2611,398 ; 2352,399 2611,399 ; 2353,-340 2629,-340 ; 2353,-337 2628,-337 ; 2353,-291 2363,-291 ; 2353,-290 2362,-290 ; 2353,-289 2361,-289 ; 2353,185 2379,185 ; 2353,186 2379,186 ; 2353,187 2379,187 ; 2353,188 2379,188 ; 2353,189 2379,189 ; 2353,190 2379,190 ; 2353,222 2387,222 ; 2353,223 2388,223 ; 2353,224 2387,224 ; 2353,236 2393,236 ; 2353,237 2394,237 ; 2353,238 2395,238 ; 2353,239 2394,239 ; 2353,240 2395,240 ; 2353,241 2396,241 ; 2353,242 2396,242 ; 2353,243 2397,243 ; 2353,244 2396,244 ; 2353,245 2398,245 ; 2353,246 2400,246 ; 2353,247 2399,247 ; 2353,248 2400,248 ; 2353,249 2401,249 ; 2353,250 2401,250 ; 2353,251 2402,251 ; 2353,252 2402,252 ; 2353,253 2403,253 ; 2353,254 2403,254 ; 2353,255 2404,255 ; 2353,256 2405,256 ; 2353,257 2405,257 ; 2353,258 2405,258 ; 2353,400 2611,400 ; 2353,401 2610,401 ; 2353,402 2610,402 ; 2353,403 2610,403 ; 2353,404 2609,404 ; 2354,-335 2355,-335 ; 2354,-334 2355,-334 ; 2354,-331 2627,-331 ; 2354,-330 2355,-330 ; 2354,-327 2626,-327 ; 2354,-325 2420,-325 ; 2354,-293 2364,-293 ; 2354,-292 2355,-292 ; 2354,191 2379,191 ; 2354,192 2379,192 ; 2354,193 2379,193 ; 2354,194 2379,194 ; 2354,195 2379,195 ; 2354,196 2379,196 ; 2354,197 2379,197 ; 2354,198 2380,198 ; 2354,199 2380,199 ; 2354,200 2381,200 ; 2354,201 2381,201 ; 2354,202 2382,202 ; 2354,203 2382,203 ; 2354,204 2382,204 ; 2354,205 2382,205 ; 2354,206 2405,206 ; 2354,207 2402,207 ; 2354,208 2402,208 ; 2354,209 2398,209 ; 2354,210 2399,210 ; 2354,211 2397,211 ; 2354,212 2395,212 ; 2354,213 2395,213 ; 2354,214 2394,214 ; 2354,215 2391,215 ; 2354,216 2390,216 ; 2354,217 2388,217 ; 2354,218 2387,218 ; 2354,219 2388,219 ; 2354,220 2384,220 ; 2354,221 2387,221 ; 2354,225 2390,225 ; 2354,226 2388,226 ; 2354,227 2392,227 ; 2354,228 2392,228 ; 2354,229 2392,229 ; 2354,230 2394,230 ; 2354,231 2395,231 ; 2354,232 2394,232 ; 2354,233 2395,233 ; 2354,234 2393,234 ; 2354,235 2394,235 ; 2354,405 2609,405 ; 2354,406 2608,406 ; 2354,407 2607,407 ; 2354,408 2607,408 ; 2354,409 2607,409 ; 2355,-338 2629,-338 ; 2355,-336 2625,-336 ; 2355,-333 2626,-333 ; 2355,-329 2626,-329 ; 2355,-328 2357,-328 ; 2355,-323 2409,-323 ; 2355,-321 2401,-321 ; 2355,-316 2356,-316 ; 2355,-295 2366,-295 ; 2355,410 2606,410 ; 2355,411 2606,411 ; 2356,-335 2627,-335 ; 2356,-332 2626,-332 ; 2356,-330 2627,-330 ; 2356,-326 2427,-326 ; 2356,-324 2413,-324 ; 2356,-322 2404,-322 ; 2356,-320 2398,-320 ; 2356,-318 2358,-318 ; 2356,-303 2372,-303 ; 2356,-297 2367,-297 ; 2356,-296 2366,-296 ; 2356,-294 2365,-294 ; 2356,-292 2364,-292 ; 2356,412 2605,412 ; 2356,413 2605,413 ; 2356,414 2604,414 ; 2357,-334 2627,-334 ; 2357,-319 2395,-319 ; 2357,-317 2359,-317 ; 2357,-316 2358,-316 ; 2357,-309 2377,-309 ; 2357,-308 2376,-308 ; 2357,-306 2374,-306 ; 2357,-305 2374,-305 ; 2357,-304 2372,-304 ; 2357,-302 2371,-302 ; 2357,-301 2370,-301 ; 2357,-300 2369,-300 ; 2357,-299 2369,-299 ; 2357,-298 2367,-298 ; 2357,415 2604,415 ; 2357,416 2603,416 ; 2357,417 2603,417 ; 2358,-328 2627,-328 ; 2358,-315 2387,-315 ; 2358,-313 2383,-313 ; 2358,-311 2380,-311 ; 2358,-307 2375,-307 ; 2358,418 2602,418 ; 2358,419 2601,419 ; 2359,-318 2393,-318 ; 2359,-316 2388,-316 ; 2359,-314 2385,-314 ; 2359,-312 2382,-312 ; 2359,-310 2379,-310 ; 2359,420 2601,420 ; 2359,421 2600,421 ; 2359,422 2599,422 ; 2360,-317 2390,-317 ; 2360,423 2599,423 ; 2360,424 2598,424 ; 2361,425 2598,425 ; 2361,426 2597,426 ; 2361,427 2597,427 ; 2362,428 2596,428 ; 2362,429 2595,429 ; 2363,430 2595,430 ; 2364,431 2594,431 ; 2364,432 2594,432 ; 2365,433 2593,433 ; 2365,434 2592,434 ; 2366,435 2591,435 ; 2366,436 2590,436 ; 2367,437 2590,437 ; 2367,438 2589,438 ; 2368,439 2588,439 ; 2369,440 2587,440 ; 2369,441 2587,441 ; 2370,442 2586,442 ; 2371,443 2585,443 ; 2371,444 2584,444 ; 2372,445 2584,445 ; 2372,446 2583,446 ; 2373,447 2582,447 ; 2374,448 2581,448 ; 2374,449 2580,449 ; 2375,450 2579,450 ; 2376,451 2578,451 ; 2377,452 2577,452 ; 2378,453 2576,453 ; 2379,300 2417,300 ; 2379,301 2417,301 ; 2379,302 2407,302 ; 2379,303 2407,303 ; 2379,304 2407,304 ; 2379,454 2575,454 ; 2379,455 2574,455 ; 2380,294 2417,294 ; 2380,295 2417,295 ; 2380,296 2417,296 ; 2380,297 2417,297 ; 2380,298 2417,298 ; 2380,299 2417,299 ; 2380,305 2407,305 ; 2380,306 2407,306 ; 2380,307 2416,307 ; 2380,308 2416,308 ; 2380,309 2415,309 ; 2380,310 2415,310 ; 2380,456 2572,456 ; 2381,290 2417,290 ; 2381,291 2417,291 ; 2381,292 2417,292 ; 2381,293 2417,293 ; 2381,311 2404,311 ; 2381,312 2400,312 ; 2381,313 2400,313 ; 2381,457 2571,457 ; 2382,287 2417,287 ; 2382,288 2417,288 ; 2382,289 2417,289 ; 2382,314 2398,314 ; 2382,315 2397,315 ; 2382,316 2397,316 ; 2382,458 2570,458 ; 2383,285 2426,285 ; 2383,286 2425,286 ; 2383,317 2397,317 ; 2383,318 2400,318 ; 2383,459 2569,459 ; 2384,259 2406,259 ; 2384,283 2428,283 ; 2384,284 2427,284 ; 2384,319 2410,319 ; 2384,460 2567,460 ; 2385,205 2410,205 ; 2385,220 2388,220 ; 2385,260 2406,260 ; 2385,281 2428,281 ; 2385,282 2428,282 ; 2385,320 2409,320 ; 2385,321 2408,321 ; 2385,461 2566,461 ; 2386,204 2413,204 ; 2386,280 2427,280 ; 2386,322 2407,322 ; 2387,203 2418,203 ; 2387,261 2407,261 ; 2387,279 2427,279 ; 2387,323 2406,323 ; 2387,462 2565,462 ; 2388,202 2426,202 ; 2388,218 2391,218 ; 2388,262 2408,262 ; 2388,278 2426,278 ; 2388,324 2405,324 ; 2388,463 2563,463 ; 2389,201 2524,201 ; 2389,217 2392,217 ; 2389,219 2390,219 ; 2389,224 2390,224 ; 2389,226 2390,226 ; 2389,263 2407,263 ; 2389,276 2423,276 ; 2389,277 2425,277 ; 2389,464 2562,464 ; 2390,200 2522,200 ; 2390,264 2409,264 ; 2390,275 2423,275 ; 2390,325 2403,325 ; 2390,465 2561,465 ; 2391,199 2520,199 ; 2391,216 2393,216 ; 2391,225 2392,225 ; 2391,226 2392,226 ; 2391,265 2409,265 ; 2391,274 2421,274 ; 2391,466 2559,466 ; 2392,198 2519,198 ; 2392,215 2393,215 ; 2392,266 2410,266 ; 2392,273 2417,273 ; 2392,326 2400,326 ; 2393,197 2517,197 ; 2393,228 2394,228 ; 2393,267 2411,267 ; 2393,467 2558,467 ; 2394,195 2422,195 ; 2394,196 2515,196 ; 2394,268 2410,268 ; 2394,272 2416,272 ; 2394,468 2556,468 ; 2395,194 2421,194 ; 2395,269 2412,269 ; 2395,271 2415,271 ; 2395,469 2554,469 ; 2396,193 2422,193 ; 2396,237 2397,237 ; 2396,238 2397,238 ; 2396,270 2413,270 ; 2397,192 2423,192 ; 2397,242 2398,242 ; 2397,470 2553,470 ; 2398,191 2423,191 ; 2398,471 2551,471 ; 2399,190 2425,190 ; 2399,209 2400,209 ; 2400,188 2426,188 ; 2400,189 2425,189 ; 2400,472 2549,472 ; 2401,312 2404,312 ; 2401,313 2403,313 ; 2401,314 2403,314 ; 2401,318 2411,318 ; 2401,473 2547,473 ; 2402,187 2428,187 ; 2402,317 2412,317 ; 2402,354 2499,354 ; 2402,355 2500,355 ; 2403,186 2430,186 ; 2403,316 2412,316 ; 2403,474 2545,474 ; 2404,184 2443,184 ; 2404,185 2498,185 ; 2404,315 2413,315 ; 2404,353 2497,353 ; 2404,475 2543,475 ; 2405,312 2414,312 ; 2405,313 2414,313 ; 2405,314 2413,314 ; 2406,183 2496,183 ; 2406,311 2415,311 ; 2406,352 2494,352 ; 2406,476 2541,476 ; 2407,182 2495,182 ; 2407,351 2494,351 ; 2408,181 2494,181 ; 2408,302 2417,302 ; 2408,303 2417,303 ; 2408,304 2417,304 ; 2408,305 2417,305 ; 2408,306 2416,306 ; 2408,350 2491,350 ; 2408,477 2539,477 ; 2409,180 2492,180 ; 2410,179 2490,179 ; 2410,349 2489,349 ; 2410,478 2537,478 ; 2411,348 2489,348 ; 2412,178 2489,178 ; 2412,347 2487,347 ; 2412,479 2534,479 ; 2413,177 2487,177 ; 2413,480 2532,480 ; 2414,176 2487,176 ; 2414,345 2485,345 ; 2414,346 2487,346 ; 2415,175 2485,175 ; 2415,344 2484,344 ; 2416,343 2483,343 ; 2416,481 2529,481 ; 2417,174 2484,174 ; 2418,173 2482,173 ; 2418,342 2482,342 ; 2418,482 2526,482 ; 2419,341 2481,341 ; 2420,172 2480,172 ; 2420,287 2428,287 ; 2420,340 2480,340 ; 2420,483 2524,483 ; 2421,288 2430,288 ; 2421,338 2478,338 ; 2421,339 2479,339 ; 2422,171 2477,171 ; 2422,289 2432,289 ; 2422,337 2477,337 ; 2423,290 2435,290 ; 2423,335 2475,335 ; 2423,336 2476,336 ; 2423,484 2521,484 ; 2424,170 2473,170 ; 2424,291 2454,291 ; 2424,334 2474,334 ; 2425,292 2477,292 ; 2425,293 2476,293 ; 2425,331 2472,331 ; 2425,332 2473,332 ; 2425,333 2473,333 ; 2425,485 2519,485 ; 2426,169 2473,169 ; 2426,286 2427,286 ; 2426,294 2476,294 ; 2426,295 2475,295 ; 2426,328 2471,328 ; 2426,329 2471,329 ; 2426,330 2471,330 ; 2427,296 2475,296 ; 2427,326 2470,326 ; 2427,327 2471,327 ; 2427,486 2516,486 ; 2428,202 2430,202 ; 2428,297 2475,297 ; 2428,298 2474,298 ; 2428,322 2470,322 ; 2428,323 2470,323 ; 2428,324 2470,324 ; 2428,325 2470,325 ; 2429,168 2469,168 ; 2429,299 2474,299 ; 2429,300 2474,300 ; 2429,301 2473,301 ; 2429,318 2470,318 ; 2429,319 2470,319 ; 2429,320 2470,320 ; 2429,321 2470,321 ; 2430,302 2472,302 ; 2430,303 2472,303 ; 2430,304 2471,304 ; 2430,305 2471,305 ; 2430,306 2470,306 ; 2430,307 2470,307 ; 2430,308 2470,308 ; 2430,309 2470,309 ; 2430,310 2470,310 ; 2430,311 2470,311 ; 2430,312 2470,312 ; 2430,313 2470,313 ; 2430,314 2470,314 ; 2430,315 2470,315 ; 2430,316 2470,316 ; 2430,317 2470,317 ; 2431,186 2447,186 ; 2431,195 2432,195 ; 2431,202 2432,202 ; 2431,487 2513,487 ; 2432,167 2465,167 ; 2433,202 2434,202 ; 2433,488 2509,488 ; 2434,166 2460,166 ; 2436,202 2526,202 ; 2437,195 2513,195 ; 2437,489 2503,489 ; 2438,203 2439,203 ; 2439,165 2451,165 ; 2440,203 2444,203 ; 2441,187 2443,187 ; 2442,191 2443,191 ; 2442,490 2497,490 ; 2443,188 2449,188 ; 2443,189 2451,189 ; 2443,193 2510,193 ; 2443,194 2513,194 ; 2444,184 2498,184 ; 2444,187 2450,187 ; 2444,190 2451,190 ; 2444,192 2509,192 ; 2445,191 2454,191 ; 2446,203 2527,203 ; 2448,186 2449,186 ; 2448,491 2490,491 ; 2450,-370 2508,-370 ; 2450,186 2453,186 ; 2450,290 2451,290 ; 2451,187 2456,187 ; 2451,188 2452,188 ; 2452,165 2453,165 ; 2452,189 2454,189 ; 2452,190 2453,190 ; 2453,188 2454,188 ; 2453,204 2529,204 ; 2454,186 2500,186 ; 2455,165 2456,165 ; 2455,188 2456,188 ; 2455,189 2460,189 ; 2455,190 2456,190 ; 2456,191 2458,191 ; 2456,279 2476,279 ; 2456,280 2475,280 ; 2456,281 2474,281 ; 2456,282 2473,282 ; 2457,-326 2626,-326 ; 2457,165 2458,165 ; 2457,187 2458,187 ; 2457,188 2503,188 ; 2457,283 2458,283 ; 2457,291 2477,291 ; 2458,190 2459,190 ; 2458,205 2506,205 ; 2458,492 2480,492 ; 2459,187 2500,187 ; 2459,191 2463,191 ; 2459,277 2476,277 ; 2459,278 2477,278 ; 2459,283 2472,283 ; 2459,290 2464,290 ; 2461,166 2462,166 ; 2461,189 2462,189 ; 2461,190 2506,190 ; 2461,206 2502,206 ; 2463,189 2465,189 ; 2463,276 2475,276 ; 2464,191 2507,191 ; 2465,290 2478,290 ; 2466,189 2505,189 ; 2466,275 2475,275 ; 2467,207 2506,207 ; 2467,274 2468,274 ; 2467,289 2479,289 ; 2469,208 2505,208 ; 2469,274 2473,274 ; 2470,-325 2625,-325 ; 2471,209 2509,209 ; 2472,288 2481,288 ; 2474,170 2475,170 ; 2474,287 2481,287 ; 2475,210 2505,210 ; 2476,286 2483,286 ; 2478,-324 2626,-324 ; 2478,211 2507,211 ; 2480,212 2509,212 ; 2480,285 2484,285 ; 2481,213 2509,213 ; 2481,284 2486,284 ; 2482,-323 2625,-323 ; 2484,214 2510,214 ; 2485,283 2488,283 ; 2486,215 2511,215 ; 2486,282 2489,282 ; 2487,216 2511,216 ; 2488,-322 2626,-322 ; 2489,281 2531,281 ; 2489,292 2536,292 ; 2489,293 2536,293 ; 2489,294 2536,294 ; 2489,295 2536,295 ; 2489,296 2536,296 ; 2489,297 2537,297 ; 2489,298 2537,298 ; 2489,299 2537,299 ; 2489,300 2537,300 ; 2489,301 2537,301 ; 2489,302 2537,302 ; 2489,303 2537,303 ; 2489,304 2536,304 ; 2489,305 2536,305 ; 2489,306 2536,306 ; 2490,217 2512,217 ; 2490,288 2535,288 ; 2490,289 2536,289 ; 2490,290 2536,290 ; 2490,291 2536,291 ; 2490,307 2536,307 ; 2490,308 2527,308 ; 2490,309 2527,309 ; 2490,310 2526,310 ; 2491,280 2530,280 ; 2491,286 2534,286 ; 2491,287 2535,287 ; 2491,311 2525,311 ; 2491,312 2520,312 ; 2492,-321 2625,-321 ; 2492,279 2530,279 ; 2492,284 2533,284 ; 2492,285 2534,285 ; 2492,313 2520,313 ; 2492,314 2520,314 ; 2493,218 2519,218 ; 2493,282 2532,282 ; 2493,283 2533,283 ; 2493,315 2519,315 ; 2493,316 2518,316 ; 2494,219 2521,219 ; 2494,317 2516,317 ; 2494,318 2515,318 ; 2495,319 2515,319 ; 2496,220 2514,220 ; 2496,278 2529,278 ; 2496,320 2514,320 ; 2496,321 2514,321 ; 2497,-320 2625,-320 ; 2497,221 2520,221 ; 2497,277 2528,277 ; 2497,322 2528,322 ; 2498,323 2528,323 ; 2499,222 2530,222 ; 2499,324 2527,324 ; 2500,223 2520,223 ; 2500,276 2526,276 ; 2500,325 2525,325 ; 2501,-319 2625,-319 ; 2501,187 2502,187 ; 2501,326 2524,326 ; 2502,224 2530,224 ; 2502,275 2525,275 ; 2502,327 2523,327 ; 2503,-318 2625,-318 ; 2503,206 2506,206 ; 2504,225 2527,225 ; 2504,274 2524,274 ; 2504,328 2520,328 ; 2505,226 2530,226 ; 2506,329 2519,329 ; 2507,-317 2625,-317 ; 2507,205 2508,205 ; 2507,210 2512,210 ; 2507,227 2532,227 ; 2507,273 2522,273 ; 2508,206 2512,206 ; 2508,207 2517,207 ; 2508,228 2533,228 ; 2509,205 2517,205 ; 2509,229 2534,229 ; 2509,272 2521,272 ; 2510,211 2511,211 ; 2510,213 2511,213 ; 2510,271 2520,271 ; 2510,330 2515,330 ; 2511,-316 2625,-316 ; 2511,230 2536,230 ; 2512,208 2516,208 ; 2512,211 2513,211 ; 2512,213 2514,213 ; 2512,216 2513,216 ; 2512,231 2535,231 ; 2513,206 2515,206 ; 2513,214 2514,214 ; 2513,217 2514,217 ; 2513,270 2521,270 ; 2514,-315 2625,-315 ; 2514,215 2515,215 ; 2514,232 2536,232 ; 2515,210 2516,210 ; 2515,211 2517,211 ; 2515,214 2516,214 ; 2515,216 2517,216 ; 2515,220 2519,220 ; 2515,269 2522,269 ; 2516,-370 2650,-370 ; 2516,-314 2625,-314 ; 2516,209 2519,209 ; 2516,215 2518,215 ; 2516,217 2519,217 ; 2516,233 2540,233 ; 2516,234 2536,234 ; 2517,268 2518,268 ; 2518,205 2531,205 ; 2518,206 2534,206 ; 2518,207 2519,207 ; 2518,210 2519,210 ; 2518,212 2520,212 ; 2518,267 2519,267 ; 2519,-313 2625,-313 ; 2519,208 2520,208 ; 2519,211 2523,211 ; 2519,214 2522,214 ; 2519,215 2520,215 ; 2519,235 2535,235 ; 2519,268 2525,268 ; 2519,321 2530,321 ; 2520,207 2537,207 ; 2520,213 2522,213 ; 2520,218 2522,218 ; 2520,220 2521,220 ; 2520,236 2539,236 ; 2521,-312 2624,-312 ; 2521,208 2539,208 ; 2521,221 2522,221 ; 2521,223 2524,223 ; 2521,237 2536,237 ; 2521,266 2524,266 ; 2521,267 2522,267 ; 2521,320 2531,320 ; 2521,360 2620,360 ; 2522,212 2525,212 ; 2522,219 2523,219 ; 2522,220 2523,220 ; 2522,319 2531,319 ; 2522,359 2620,359 ; 2523,-311 2625,-311 ; 2523,215 2524,215 ; 2523,218 2524,218 ; 2523,221 2524,221 ; 2523,238 2537,238 ; 2523,265 2524,265 ; 2523,267 2527,267 ; 2523,318 2532,318 ; 2524,214 2527,214 ; 2524,219 2526,219 ; 2524,220 2527,220 ; 2524,358 2620,358 ; 2525,-310 2623,-310 ; 2525,209 2541,209 ; 2525,239 2543,239 ; 2525,264 2526,264 ; 2525,316 2533,316 ; 2525,317 2533,317 ; 2526,210 2546,210 ; 2526,213 2527,213 ; 2526,217 2527,217 ; 2526,218 2528,218 ; 2526,223 2530,223 ; 2526,240 2542,240 ; 2526,314 2534,314 ; 2526,315 2534,315 ; 2527,-309 2624,-309 ; 2527,211 2528,211 ; 2527,216 2528,216 ; 2527,221 2530,221 ; 2527,266 2530,266 ; 2527,312 2535,312 ; 2527,313 2534,313 ; 2528,214 2530,214 ; 2528,217 2529,217 ; 2528,219 2530,219 ; 2528,220 2530,220 ; 2528,225 2530,225 ; 2528,241 2541,241 ; 2528,263 2529,263 ; 2528,264 2529,264 ; 2528,265 2535,265 ; 2528,308 2536,308 ; 2528,309 2536,309 ; 2528,310 2536,310 ; 2528,311 2535,311 ; 2528,357 2620,357 ; 2529,-308 2625,-308 ; 2529,211 2589,211 ; 2529,216 2532,216 ; 2529,242 2541,242 ; 2530,-307 2624,-307 ; 2530,218 2534,218 ; 2530,264 2538,264 ; 2530,356 2621,356 ; 2531,212 2591,212 ; 2531,213 2588,213 ; 2531,214 2639,214 ; 2531,215 2532,215 ; 2531,219 2532,219 ; 2531,221 2532,221 ; 2531,222 2533,222 ; 2531,225 2532,225 ; 2531,226 2533,226 ; 2531,243 2541,243 ; 2531,244 2538,244 ; 2531,263 2532,263 ; 2531,355 2621,355 ; 2532,-306 2625,-306 ; 2532,217 2534,217 ; 2533,221 2536,221 ; 2533,223 2534,223 ; 2533,262 2535,262 ; 2533,263 2626,263 ; 2533,354 2621,354 ; 2534,-305 2624,-305 ; 2534,215 2587,215 ; 2534,216 2638,216 ; 2534,219 2535,219 ; 2534,220 2535,220 ; 2534,353 2621,353 ; 2535,217 2586,217 ; 2535,218 2538,218 ; 2535,223 2536,223 ; 2535,229 2536,229 ; 2535,352 2621,352 ; 2536,-304 2624,-304 ; 2536,219 2539,219 ; 2536,235 2537,235 ; 2536,261 2626,261 ; 2536,262 2626,262 ; 2536,351 2621,351 ; 2537,232 2539,232 ; 2537,234 2538,234 ; 2537,350 2621,350 ; 2538,-303 2625,-303 ; 2538,222 2539,222 ; 2538,231 2539,231 ; 2538,235 2539,235 ; 2538,237 2543,237 ; 2538,238 2543,238 ; 2538,245 2539,245 ; 2538,260 2626,260 ; 2538,348 2621,348 ; 2538,349 2621,349 ; 2539,218 2543,218 ; 2539,234 2541,234 ; 2539,346 2621,346 ; 2539,347 2621,347 ; 2540,-302 2625,-302 ; 2540,219 2544,219 ; 2540,225 2541,225 ; 2540,235 2542,235 ; 2540,236 2542,236 ; 2540,344 2621,344 ; 2540,345 2621,345 ; 2541,233 2542,233 ; 2541,341 2622,341 ; 2541,342 2622,342 ; 2541,343 2622,343 ; 2542,-301 2624,-301 ; 2542,209 2544,209 ; 2542,259 2626,259 ; 2542,264 2626,264 ; 2542,338 2622,338 ; 2542,339 2622,339 ; 2542,340 2622,340 ; 2543,-300 2625,-300 ; 2543,220 2544,220 ; 2543,221 2544,221 ; 2543,336 2623,336 ; 2543,337 2623,337 ; 2544,218 2637,218 ; 2544,223 2545,223 ; 2544,224 2545,224 ; 2544,226 2546,226 ; 2544,335 2623,335 ; 2545,-299 2624,-299 ; 2545,219 2637,219 ; 2545,220 2637,220 ; 2545,221 2547,221 ; 2545,265 2626,265 ; 2545,333 2623,333 ; 2545,334 2623,334 ; 2546,222 2636,222 ; 2546,223 2549,223 ; 2546,224 2549,224 ; 2546,258 2626,258 ; 2546,266 2626,266 ; 2546,267 2626,267 ; 2547,-298 2625,-298 ; 2547,257 2626,257 ; 2547,268 2626,268 ; 2547,331 2623,331 ; 2547,332 2623,332 ; 2548,-297 2624,-297 ; 2548,210 2593,210 ; 2548,221 2636,221 ; 2548,225 2549,225 ; 2548,226 2549,226 ; 2548,228 2549,228 ; 2548,256 2626,256 ; 2548,269 2626,269 ; 2548,270 2626,270 ; 2548,330 2623,330 ; 2549,209 2593,209 ; 2549,227 2550,227 ; 2549,229 2634,229 ; 2549,230 2633,230 ; 2549,231 2633,231 ; 2549,235 2631,235 ; 2549,237 2631,237 ; 2549,255 2626,255 ; 2549,271 2626,271 ; 2549,272 2625,272 ; 2549,273 2625,273 ; 2549,328 2623,328 ; 2549,329 2623,329 ; 2550,208 2593,208 ; 2550,223 2636,223 ; 2550,224 2635,224 ; 2550,226 2635,226 ; 2550,232 2632,232 ; 2550,233 2632,233 ; 2550,234 2632,234 ; 2550,236 2631,236 ; 2550,238 2631,238 ; 2550,239 2630,239 ; 2550,240 2630,240 ; 2550,254 2627,254 ; 2550,274 2625,274 ; 2550,325 2623,325 ; 2550,326 2623,326 ; 2550,327 2623,327 ; 2551,-296 2624,-296 ; 2551,207 2593,207 ; 2551,225 2635,225 ; 2551,227 2634,227 ; 2551,228 2634,228 ; 2551,241 2630,241 ; 2551,242 2630,242 ; 2551,251 2627,251 ; 2551,253 2627,253 ; 2551,275 2625,275 ; 2551,276 2625,276 ; 2551,277 2625,277 ; 2551,322 2623,322 ; 2551,323 2623,323 ; 2551,324 2623,324 ; 2552,-295 2625,-295 ; 2552,205 2592,205 ; 2552,206 2592,206 ; 2552,243 2629,243 ; 2552,244 2629,244 ; 2552,245 2628,245 ; 2552,250 2627,250 ; 2552,252 2627,252 ; 2552,278 2625,278 ; 2552,279 2625,279 ; 2552,318 2623,318 ; 2552,319 2623,319 ; 2552,320 2623,320 ; 2552,321 2623,321 ; 2553,204 2594,204 ; 2553,246 2628,246 ; 2553,247 2628,247 ; 2553,248 2628,248 ; 2553,249 2627,249 ; 2553,280 2625,280 ; 2553,281 2625,281 ; 2553,282 2625,282 ; 2553,315 2623,315 ; 2553,316 2623,316 ; 2553,317 2623,317 ; 2554,-371 2654,-371 ; 2554,-294 2625,-294 ; 2554,202 2594,202 ; 2554,203 2596,203 ; 2554,283 2625,283 ; 2554,284 2625,284 ; 2554,285 2624,285 ; 2554,286 2625,286 ; 2554,287 2624,287 ; 2554,309 2623,309 ; 2554,310 2623,310 ; 2554,311 2623,311 ; 2554,312 2623,312 ; 2554,313 2623,313 ; 2554,314 2623,314 ; 2555,-293 2624,-293 ; 2555,201 2594,201 ; 2555,288 2624,288 ; 2555,289 2624,289 ; 2555,290 2624,290 ; 2555,291 2624,291 ; 2555,292 2624,292 ; 2555,293 2624,293 ; 2555,294 2624,294 ; 2555,295 2624,295 ; 2555,296 2624,296 ; 2555,297 2624,297 ; 2555,298 2624,298 ; 2555,299 2624,299 ; 2555,300 2624,300 ; 2555,301 2624,301 ; 2555,302 2624,302 ; 2555,303 2624,303 ; 2555,304 2623,304 ; 2555,305 2623,305 ; 2555,306 2623,306 ; 2555,307 2623,307 ; 2555,308 2623,308 ; 2556,199 2597,199 ; 2556,200 2596,200 ; 2557,-292 2625,-292 ; 2557,191 2599,191 ; 2557,192 2600,192 ; 2557,193 2599,193 ; 2557,194 2599,194 ; 2557,195 2597,195 ; 2557,196 2597,196 ; 2557,197 2596,197 ; 2557,198 2595,198 ; 2558,-291 2625,-291 ; 2558,188 2601,188 ; 2558,189 2599,189 ; 2558,190 2602,190 ; 2559,-290 2625,-290 ; 2559,187 2604,187 ; 2560,185 2654,185 ; 2560,186 2600,186 ; 2561,-289 2625,-289 ; 2561,183 2655,183 ; 2561,184 2655,184 ; 2562,-288 2624,-288 ; 2562,180 2657,180 ; 2562,181 2656,181 ; 2562,182 2656,182 ; 2563,-287 2625,-287 ; 2563,178 2658,178 ; 2563,179 2657,179 ; 2564,-286 2625,-286 ; 2564,176 2659,176 ; 2564,177 2658,177 ; 2565,174 2660,174 ; 2565,175 2660,175 ; 2566,-285 2625,-285 ; 2566,172 2661,172 ; 2566,173 2661,173 ; 2567,-284 2625,-284 ; 2567,170 2662,170 ; 2567,171 2662,171 ; 2568,168 2664,168 ; 2568,169 2663,169 ; 2569,-283 2625,-283 ; 2569,-282 2624,-282 ; 2569,166 2665,166 ; 2569,167 2664,167 ; 2570,164 2666,164 ; 2570,165 2665,165 ; 2571,-281 2625,-281 ; 2571,162 2667,162 ; 2571,163 2666,163 ; 2572,-372 2658,-372 ; 2572,-280 2625,-280 ; 2572,160 2668,160 ; 2572,161 2667,161 ; 2573,158 2669,158 ; 2573,159 2669,159 ; 2574,-279 2624,-279 ; 2574,156 2670,156 ; 2574,157 2670,157 ; 2575,-278 2625,-278 ; 2575,154 2671,154 ; 2575,155 2671,155 ; 2576,-373 2654,-373 ; 2576,-277 2626,-277 ; 2576,152 2672,152 ; 2576,153 2672,153 ; 2577,-276 2625,-276 ; 2577,150 2674,150 ; 2577,151 2673,151 ; 2578,148 2675,148 ; 2578,149 2674,149 ; 2579,-275 2626,-275 ; 2579,-274 2624,-274 ; 2579,147 2675,147 ; 2580,145 2677,145 ; 2580,146 2676,146 ; 2581,-273 2623,-273 ; 2581,143 2678,143 ; 2581,144 2677,144 ; 2582,-374 2671,-374 ; 2582,-272 2625,-272 ; 2582,141 2680,141 ; 2582,142 2679,142 ; 2583,-271 2626,-271 ; 2583,139 2680,139 ; 2583,140 2680,140 ; 2584,-270 2626,-270 ; 2584,137 2682,137 ; 2584,138 2681,138 ; 2585,-269 2625,-269 ; 2585,135 2683,135 ; 2585,136 2682,136 ; 2586,-268 2625,-268 ; 2586,133 2684,133 ; 2586,134 2683,134 ; 2587,-375 2663,-375 ; 2587,-267 2623,-267 ; 2587,130 2686,130 ; 2587,131 2686,131 ; 2587,132 2685,132 ; 2588,-376 2733,-376 ; 2588,-266 2625,-266 ; 2588,128 2688,128 ; 2588,129 2687,129 ; 2589,-265 2626,-265 ; 2589,126 2689,126 ; 2589,127 2688,127 ; 2589,217 2638,217 ; 2590,-264 2625,-264 ; 2590,123 2692,123 ; 2590,124 2691,124 ; 2590,125 2689,125 ; 2590,211 2595,211 ; 2591,119 2695,119 ; 2591,120 2694,120 ; 2591,121 2693,121 ; 2591,122 2692,122 ; 2591,213 2592,213 ; 2591,215 2639,215 ; 2592,-263 2624,-263 ; 2592,115 2698,115 ; 2592,116 2697,116 ; 2592,117 2696,117 ; 2592,118 2696,118 ; 2592,212 2593,212 ; 2593,-262 2627,-262 ; 2593,110 2702,110 ; 2593,111 2702,111 ; 2593,112 2701,112 ; 2593,113 2700,113 ; 2593,114 2699,114 ; 2593,205 2594,205 ; 2593,206 2594,206 ; 2593,213 2639,213 ; 2594,-261 2626,-261 ; 2594,107 2705,107 ; 2594,108 2704,108 ; 2594,109 2703,109 ; 2594,208 2642,208 ; 2594,210 2641,210 ; 2594,212 2595,212 ; 2595,-378 2730,-378 ; 2595,-377 2731,-377 ; 2595,-260 2626,-260 ; 2595,102 2709,102 ; 2595,103 2708,103 ; 2595,104 2708,104 ; 2595,105 2707,105 ; 2595,106 2706,106 ; 2595,205 2596,205 ; 2595,206 2596,206 ; 2596,-379 2729,-379 ; 2596,-259 2625,-259 ; 2596,98 2713,98 ; 2596,99 2712,99 ; 2596,100 2711,100 ; 2596,101 2710,101 ; 2596,201 2597,201 ; 2596,202 2597,202 ; 2596,212 2640,212 ; 2597,-382 2727,-382 ; 2597,-381 2728,-381 ; 2597,-380 2728,-380 ; 2597,-258 2624,-258 ; 2597,95 2716,95 ; 2597,96 2715,96 ; 2597,97 2714,97 ; 2597,198 2599,198 ; 2597,204 2601,204 ; 2597,206 2602,206 ; 2597,211 2640,211 ; 2598,-384 2725,-384 ; 2598,-383 2726,-383 ; 2598,-257 2625,-257 ; 2598,90 2721,90 ; 2598,91 2720,91 ; 2598,92 2719,92 ; 2598,93 2718,93 ; 2598,94 2717,94 ; 2598,196 2600,196 ; 2598,201 2599,201 ; 2598,202 2599,202 ; 2599,-387 2721,-387 ; 2599,-386 2723,-386 ; 2599,-385 2723,-385 ; 2599,-256 2627,-256 ; 2599,84 2726,84 ; 2599,85 2726,85 ; 2599,86 2725,86 ; 2599,87 2723,87 ; 2599,88 2723,88 ; 2599,89 2721,89 ; 2599,195 2603,195 ; 2599,199 2600,199 ; 2599,200 2600,200 ; 2599,209 2641,209 ; 2600,-389 2719,-389 ; 2600,-388 2720,-388 ; 2600,-255 2625,-255 ; 2600,78 2731,78 ; 2600,79 2730,79 ; 2600,80 2729,80 ; 2600,81 2729,81 ; 2600,82 2728,82 ; 2600,83 2728,83 ; 2600,193 2601,193 ; 2600,197 2601,197 ; 2600,198 2601,198 ; 2600,202 2602,202 ; 2601,-391 2717,-391 ; 2601,-390 2718,-390 ; 2601,-254 2625,-254 ; 2601,75 2733,75 ; 2601,76 2732,76 ; 2601,77 2731,77 ; 2601,189 2602,189 ; 2601,192 2606,192 ; 2601,200 2605,200 ; 2601,205 2602,205 ; 2601,207 2642,207 ; 2602,-392 2716,-392 ; 2602,-253 2626,-253 ; 2602,-252 2626,-252 ; 2602,74 2734,74 ; 2602,197 2603,197 ; 2602,198 2603,198 ; 2602,203 2603,203 ; 2602,204 2603,204 ; 2603,-393 2715,-393 ; 2603,-251 2627,-251 ; 2603,73 2735,73 ; 2603,189 2604,189 ; 2603,190 2604,190 ; 2603,194 2604,194 ; 2603,202 2604,202 ; 2603,206 2607,206 ; 2604,-395 2713,-395 ; 2604,-394 2714,-394 ; 2604,-250 2626,-250 ; 2604,-249 2625,-249 ; 2604,72 2736,72 ; 2604,186 2605,186 ; 2604,195 2605,195 ; 2604,197 2609,197 ; 2604,198 2605,198 ; 2604,203 2605,203 ; 2604,204 2605,204 ; 2605,-396 2712,-396 ; 2605,-248 2625,-248 ; 2605,-247 2626,-247 ; 2605,71 2736,71 ; 2605,187 2608,187 ; 2605,188 2606,188 ; 2605,190 2608,190 ; 2605,194 2606,194 ; 2605,199 2607,199 ; 2605,201 2607,201 ; 2605,202 2606,202 ; 2606,-397 2711,-397 ; 2606,-246 2625,-246 ; 2606,70 2737,70 ; 2606,186 2654,186